# Altium PCB WoodStoveLayout1.PcbDoc (part 1 of 4)
Units mil, origin at the board's own origin, x right, y up, seen from the top; angles counter-clockwise.
Board outline 4000 x 3000 mil, 4 copper layers (Top Layer, L2, L3, Bottom Layer), stack 64.6 mil thick; 132 components, 92 nets, 551 pads, 53 vias.
Unrouted connection lines stored in the file: 224.
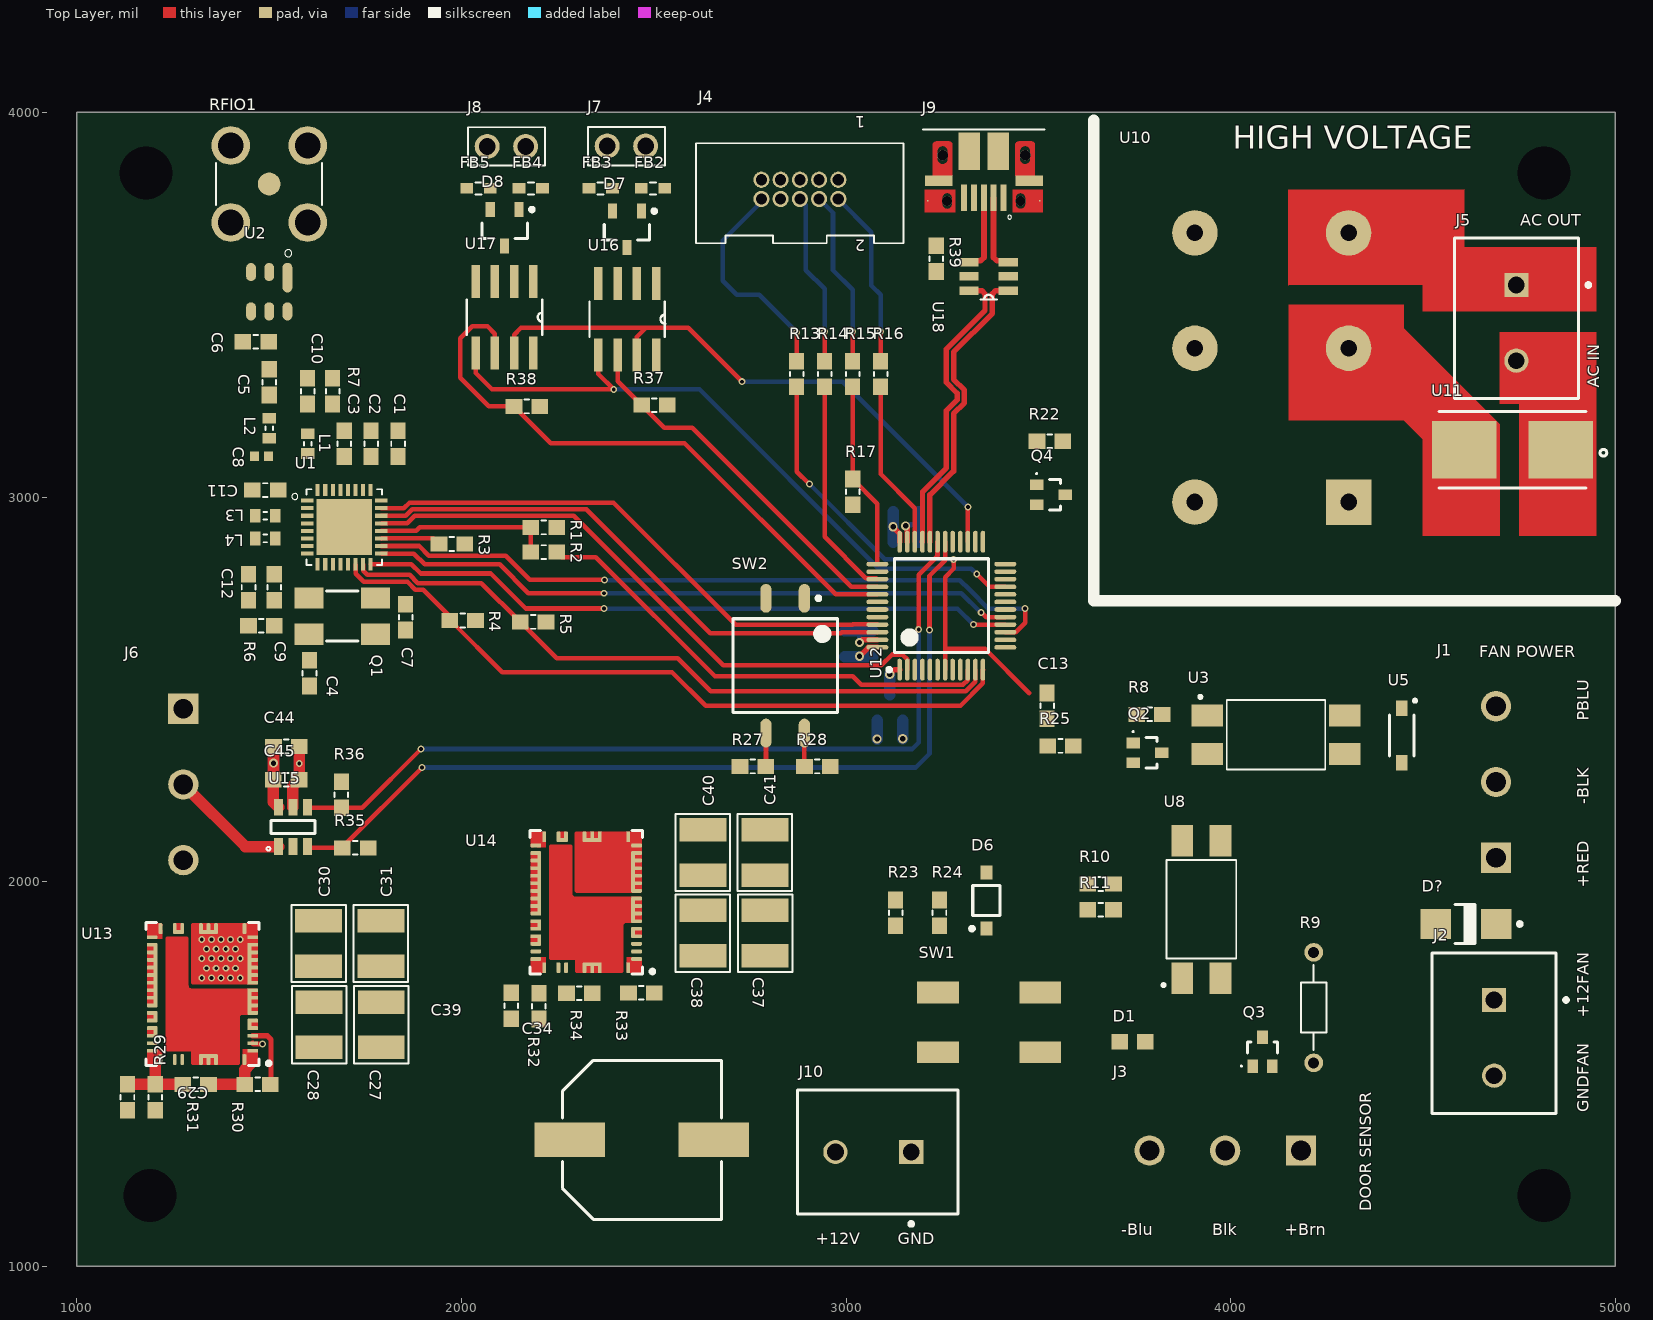
[diagram p0: Top Layer view]
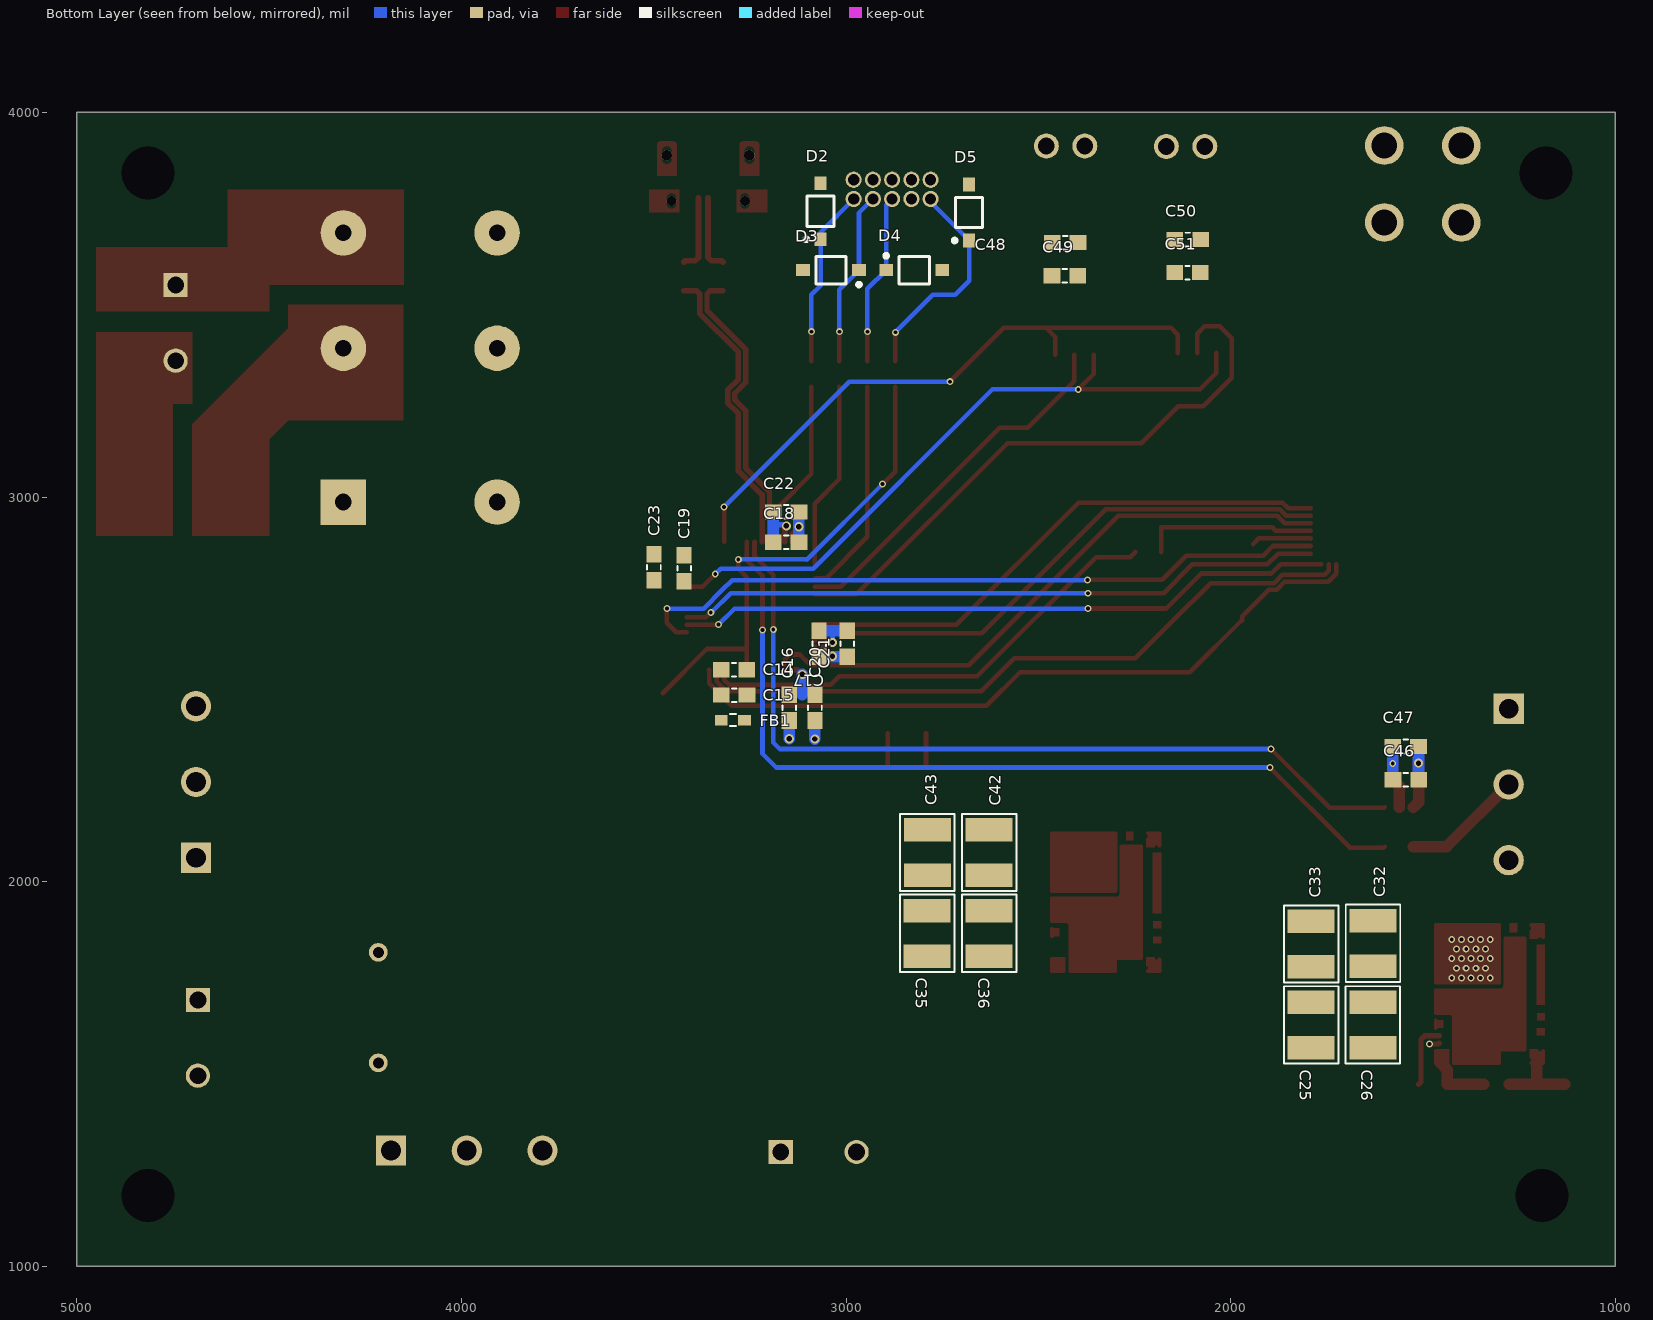
[diagram p1: Bottom Layer view, seen from below]
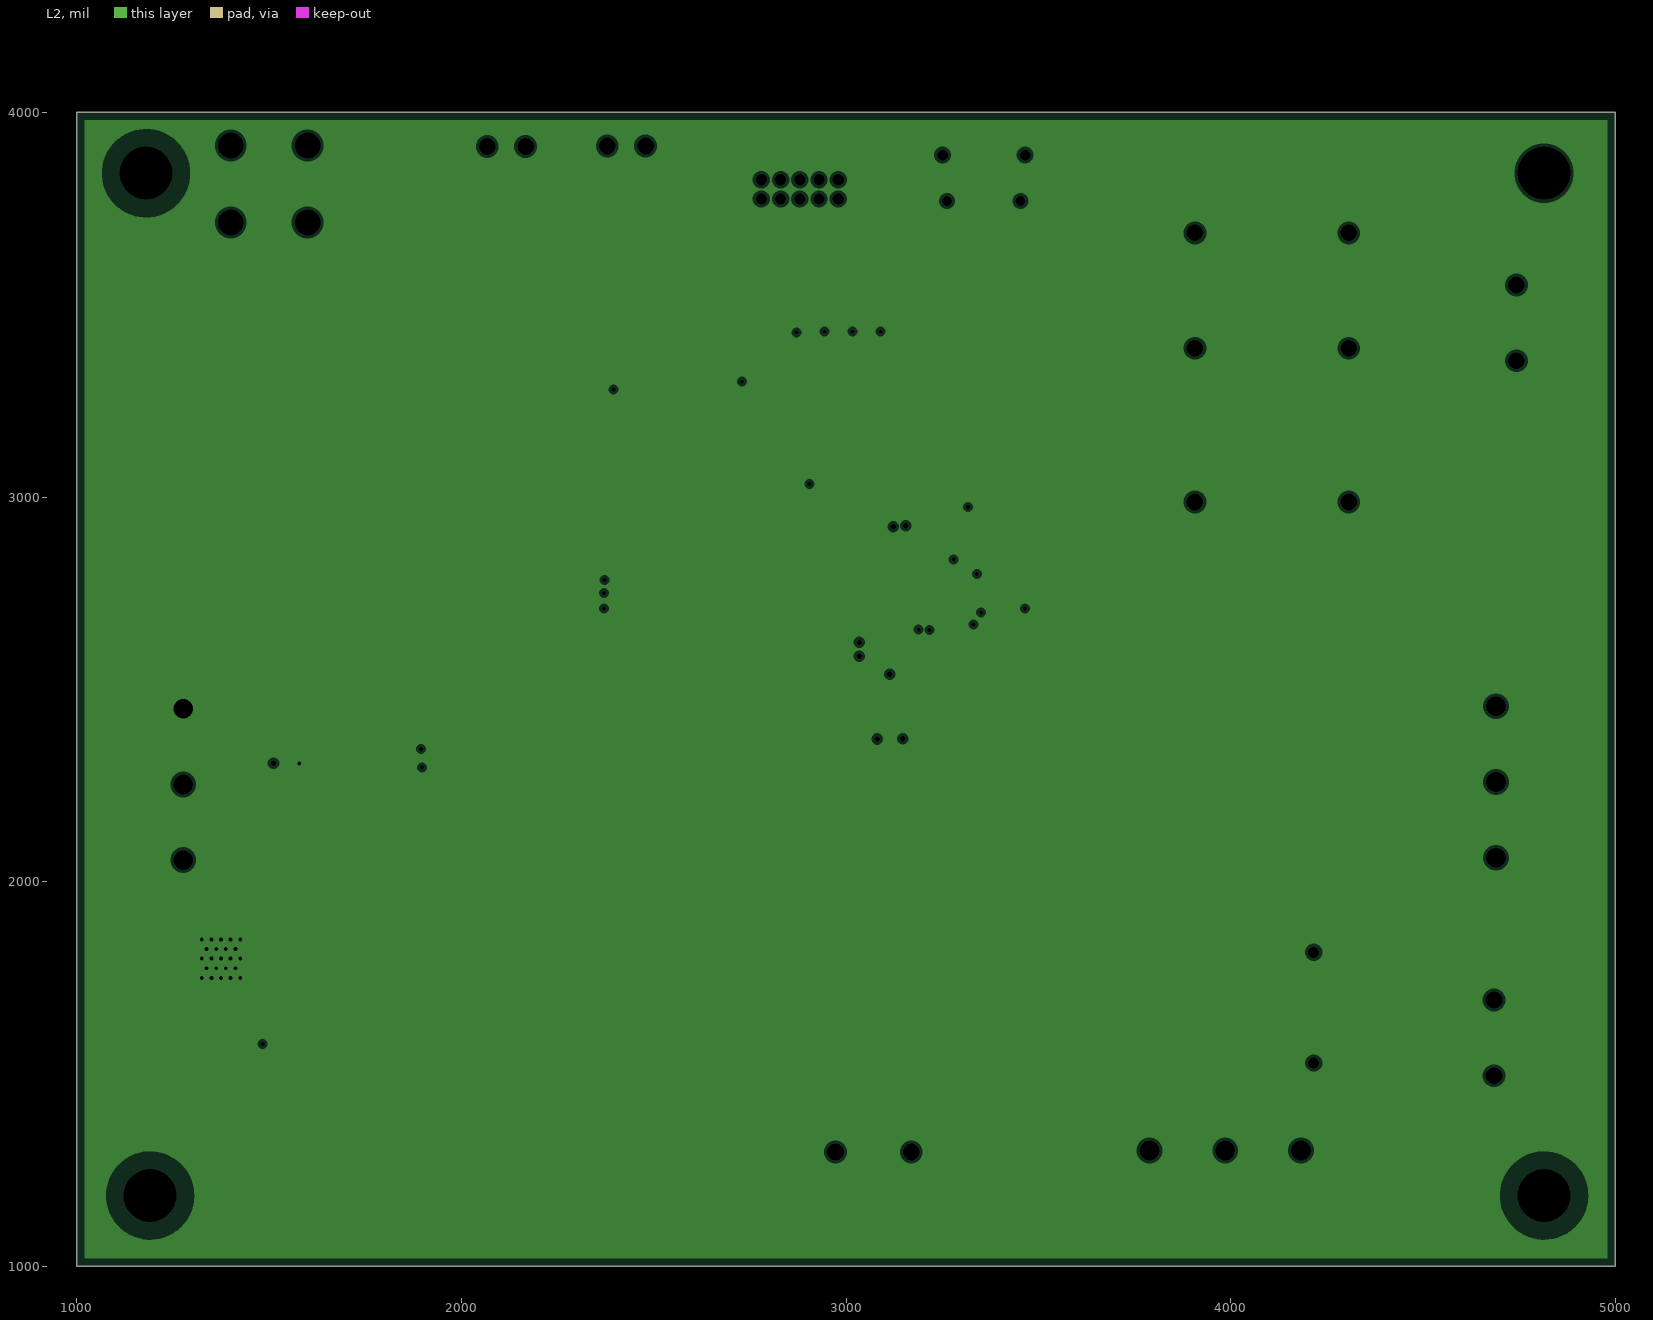
[diagram p2: L2, clearances drawn from the general rule]
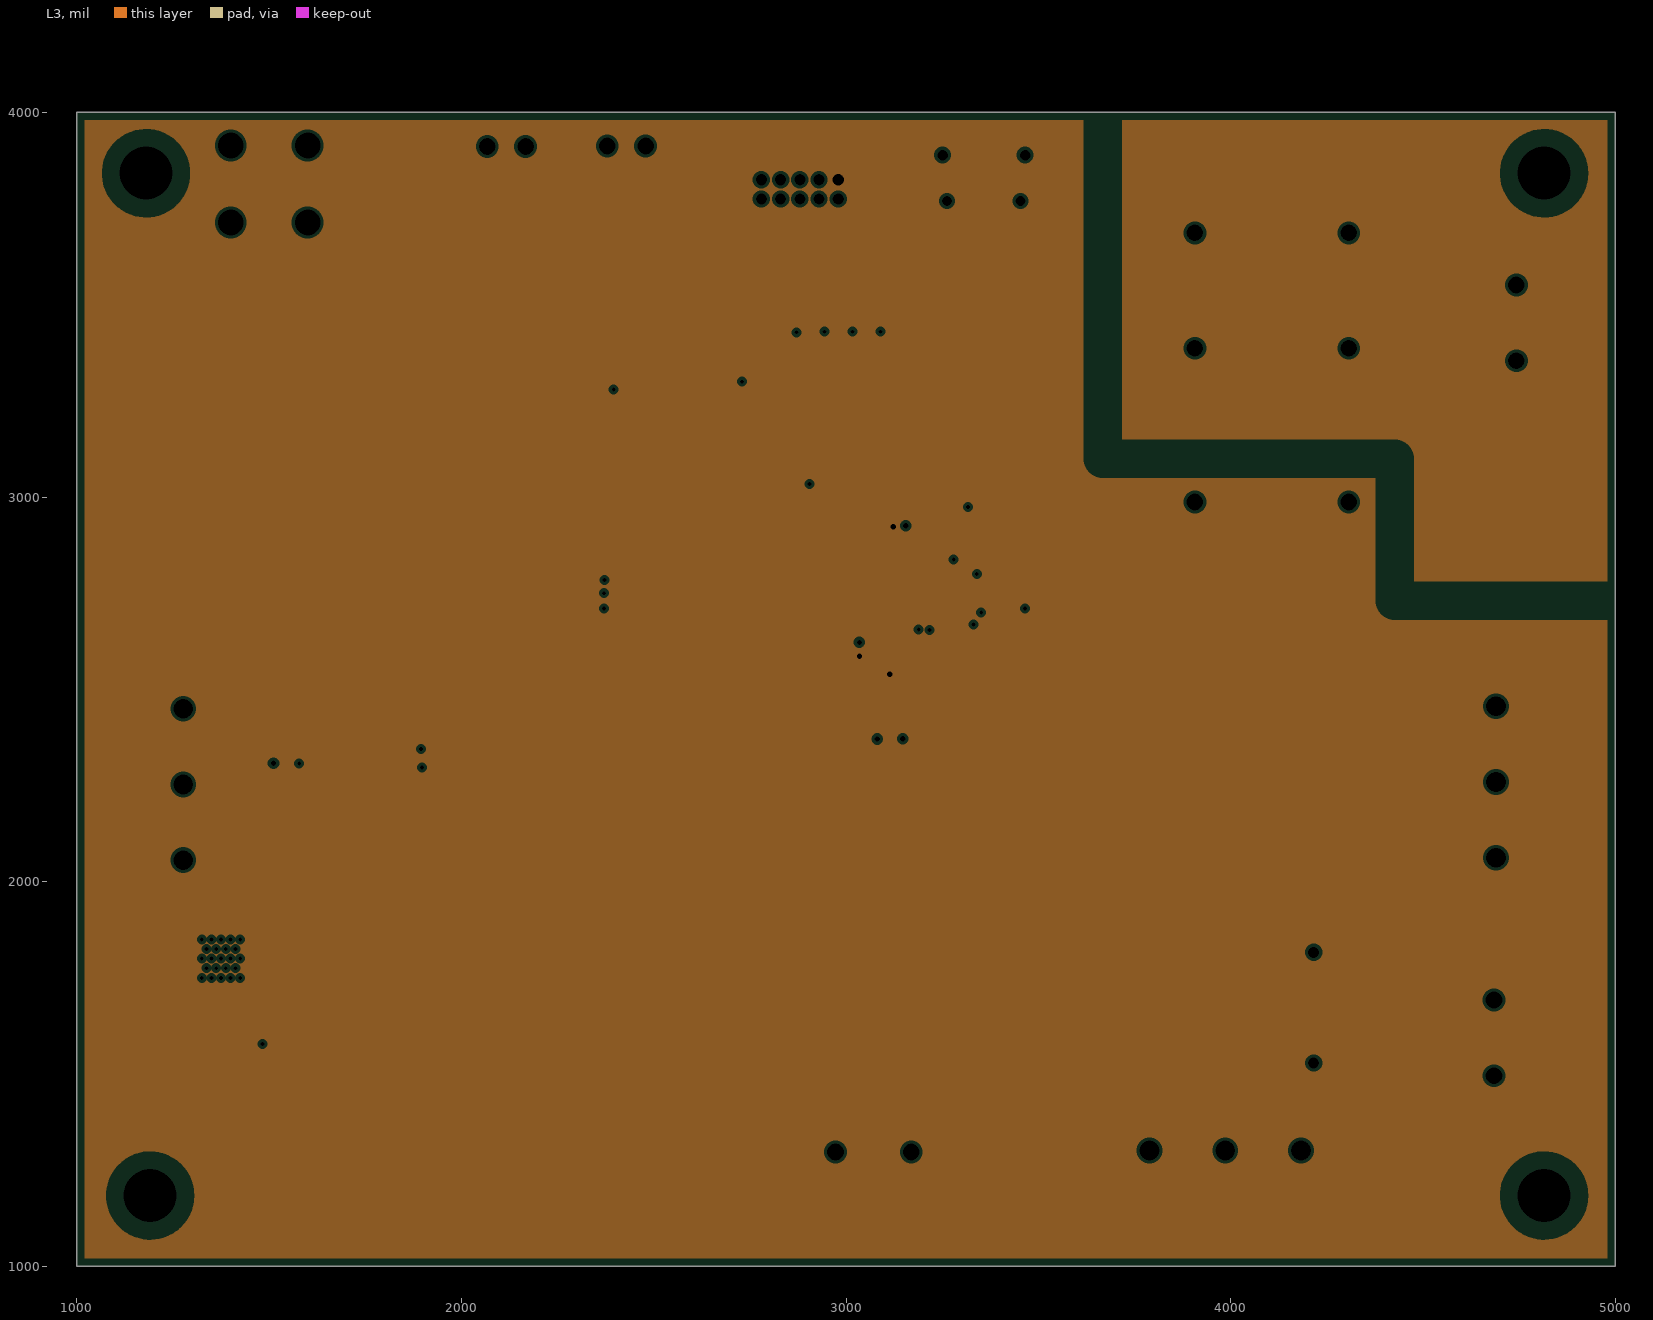
[diagram p3: L3, clearances drawn from the general rule]

## Layer stack, top to bottom
Top Solder: solder mask 1, Solder Resist, Dk 3.5
Top Layer: signal copper 1.4
Dielectric 1: core 6.7, FR-4, Dk 3.66
L2: plane copper 0.7, net +5V
Dielectric 3: prepreg 47, FR-4, Dk 3.66
L3: plane copper 0.7, net +3V3
Dielectric 2: core 6.7, FR-4, Dk 3.66
Bottom Layer: signal copper 1.4
Bottom Solder: solder mask 1, Solder Resist, Dk 3.5

## Board outline
1000,1000 1000,4000 5000,4000 5000,1000

## Design rules (kind name [scope] priority, off if disabled: settings)
Clearance [All] p1: gap=5 ignorepadtopadclearanceinfootprint=FALSE
ComponentClearance [All] p1: gap=2 collisioncheckmode=3 verticalgap=10 showdistances=FALSE
DiffPairsRouting DiffPair_DIFF90DiffPairsRouting [InDifferentialPair ('USB')] p1: maxlimit=8 minlimit=4 mostfreqgap=5 toplayer_minwidth=12 toplayer_maxwidth=14 toplayer_prefwidth=14 bottomlayer_minwidth=12 bottomlayer_maxwidth=14 bottomlayer_prefwidth=14 maxuncoupledlength=10
DiffPairsRouting [All] p2: maxlimit=10 minlimit=10 mostfreqgap=10 toplayer_minwidth=15 toplayer_maxwidth=15 toplayer_prefwidth=15 bottomlayer_minwidth=15 bottomlayer_maxwidth=15 bottomlayer_prefwidth=15 maxuncoupledlength=500
MatchedLengths "Jtag Matched Net Length" [InNetClass('JTAGDATA')] p1: tolerance=10 checknetsindiffpair=FALSE checkdiffpairvsdiffpair=TRUE checkxsignals=TRUE checkothers=TRUE
MatchedLengths "SPI1 Matched Net Length" [InNetClass('SPI1DATA')] p2: tolerance=10 checknetsindiffpair=FALSE checkdiffpairvsdiffpair=TRUE checkxsignals=TRUE checkothers=TRUE
MatchedLengths "I2C Matched Net Length" [InNetClass('I2CCLASS')] p3: tolerance=10 checknetsindiffpair=FALSE checkdiffpairvsdiffpair=TRUE checkxsignals=TRUE checkothers=TRUE
MatchedLengths "SPI2 Matched Net Length" [InNetClass('SPI2DATACLASS')] p4: tolerance=10 checknetsindiffpair=FALSE checkdiffpairvsdiffpair=TRUE checkxsignals=TRUE checkothers=TRUE
MatchedLengths DiffPair_DIFF90MatchedLengths [InDifferentialPair ('USB')] p5: tolerance=1 checknetsindiffpair=TRUE checkdiffpairvsdiffpair=FALSE checkxsignals=FALSE checkothers=FALSE
PlaneClearance [All] p1: clearance=8
PlaneConnect [All] p1: planeconnectstyle=Relief reliefexpansion=20 reliefentries=4 reliefconductorwidth=10 reliefairgap=10
PolygonConnect [All] p1: connectstyle=Relief reliefconductorwidth=10 reliefentries=4 polygonreliefangle="90 Angle" airgapwidth=10
RoutingVias POWER2 [InNet('+3V3')] p1: holewidth=14 width=24 viastyle="Through Hole" minholewidth=12 minwidth=20 maxholewidth=18 maxwidth=28
RoutingVias GroundVIas [InNet('GND')] p2: holewidth=14 width=24 viastyle="Through Hole" minholewidth=12 minwidth=20 maxholewidth=18 maxwidth=28
RoutingVias [All] p3: holewidth=10 width=18 viastyle="Through Hole" minholewidth=10 minwidth=18 maxholewidth=20 maxwidth=30
SolderMaskExpansion [All] p1: expansion=4
Width GroundWidth [InNet('GND')] p1: maxlimit=50 minlimit=12 preferedwidth=14
Width POWER [InNet('+3V3')] p2: maxlimit=50 minlimit=12 preferedwidth=14
Width [All] p3: maxlimit=30 minlimit=10 preferedwidth=12
26 further rules are at their usual default settings.

## Classes and differential pairs
net class JTAGDATA: NetR14_1 NetR15_1 NetR16_1
net class TCOUPLENETS: NetR37_1 NetR38_1 NetU12_21 NetU12_27
net class RFNETS: NetR2_2 NetR4_1 NetR5_1 NetU1_16 NetU1_17 NetU1_18 NetU1_21 NetU1_22 NetU1_23
net class SPI1DATA: NetU1_16 NetU1_17 NetU1_18
net class JTAGNETS: NetR14_1 NetR15_1 NetR16_1 RSTNET
net class SPI2DATACLASS: NetU12_21 NetU12_27
net class I2CCLASS: NetR35_1 NetR36_1
differential pair class DIFF90: USB USBOUT
net class USBOCLASS: USBOUT_N USBOUT_P
net class USBCLASS: USB_N USB_P
component class USB: J9 R39 U18
component class Thermocouple: C48 C49 C50 C51 D7 D8 FB2 FB3 FB4 FB5 J7 J8 R37 R38 U16 U17
component class RFDesign: C1 C2 C3 C4 C5 C6 C7 C8 C9 C10 C11 C12 L1 L2 L3 L4 Q1 R1 R2 R3 R4 R5 R6 R7 RFIO1 U1 U2
component class PressureSensor: C44 C45 C46 C47 J6 R35 R36 U15
component class Power: C25 C26 C27 C28 C29 C30 C31 C32 C33 C34 C35 C36 C37 C38 C39 C40 C41 C42 C43 J10 R29 R30 R31 R32 R33 R34 U13 U14
component class MCU: C13 C14 C15 C16 C17 C18 C19 C20 C21 C22 C23 D6 FB1 R23 R24 R25 R27 R28 SW1 SW2 U12
component class LightRelay: J5 Q4 R22 U10 U11
component class JTAG: D2 D3 D4 D5 J4 R13 R14 R15 R16 R17
component class InductiveSensor: D1 J3 Q3 R9 R10 R11 U8
component class FanPWM: D? J1 J2 Q2 R8 U3 U5
differential pair USB: +USB_P -USB_N
differential pair USBOUT: +USBOUT_P -USBOUT_N

## Components (designator, comment, footprint, x,y, rotation, side; value= is the part's Value field where it differs from the comment)
C1 "1uf_10V_0603" 0603#1 1835.33,3139 r270 top
C2 "1uf_10V_0603" 0603#1 1765.33,3139 r270 top
C3 "220nF_25V_0603" 0603#1 1695.33,3139 r270 top
C4 "NC_0603" 0603#1 1605.09,2542.07 r270 top
C5 "22pF_50V_0603" 0603#1 1500.33,3299 r270 top
C6 "1.8pF_50V_0603" 0603#1 1465.33,3404 r0 top
C7 "NC_0603" 0603#1 1855,2687.85 r90 top
C8 "Cap" 0402#1 1480.33,3106 r0 top value=4.7uf
C9 "680pF_50V_0603" 0603#1 1513.56,2765.53 r270 top
C10 "47nF_50V_0603" 0603#1 1600.33,3275.53 r270 top
C11 "100nF_50V_0603" 0603#1 1490.09,3018.21 r0 top
C12 "10nF_50V_0603" 0603#1 1446.63,2765.53 r90 top
C13 "100nF_50V_0603" 0603#1 3523,2457 r270 top
C14 "1uf_10V_0603" 0603#1 3291.17,2551.23 r0 bottom
C15 "100nF_50V_0603" 0603#1 3291,2485 r0 bottom
C16 "100nF_50V_0603" 0603#1 3147.59,2452.57 r90 bottom
C17 "100nF_50V_0603" 0603#1 3069.85,2618.57 r270 bottom
C18 "100nF_50V_0603" 0603#1 3155.86,2882.57 r180 bottom
C19 "100nF_50V_0603" 0603#1 3420.86,2814.84 r90 bottom
C20 "1uf_10V_0603" 0603#1 3080.86,2452.57 r90 bottom
C21 "1uf_10V_0603" 0603#1 2996.86,2618.57 r270 bottom
C22 "1uf_10V_0603" 0603#1 3155.86,2961.49 r180 bottom
C23 "1uf_10V_0603" 0603#1 3499.32,2817.57 r90 bottom
C25 "10uF_50V_1210" 1210 1790.87,1627.79 r270 bottom
C26 "10uF_50V_1210" 1210 1630,1627.79 r270 bottom
C27 "4.7uf_50V_1210" 1210 1791.67,1628.1 r270 top
C28 "4.7uf_50V_1210" 1210 1630,1628.1 r270 top
C29 "100pF_50V_0603" 0603#1 1131.8,1439.44 r270 top
C30 "22uF_25V_1210" 1210 1629,1839.06 r90 top
C31 "22uF_25V_1210" 1210 1790.67,1839.06 r90 top
C32 "22uF_25V_1210" 1210 1629.87,1839.79 r90 bottom
C33 "22uF_25V_1210" 1210 1790.67,1837.79 r90 bottom
C34 "100uF_50V_smd_NC" CAPAE120103X105M 2469,1329 r0 top
C35 "10uF_50V_1210" 1210 2788.87,1865.79 r270 bottom
C36 "10uF_50V_1210" 1210 2628,1865.79 r270 bottom
C37 "4.7uf_50V_1210" 1210 2789.67,1866.1 r270 top
C38 "4.7uf_50V_1210" 1210 2628,1866.1 r270 top
C39 "150pF_50V_0603" 0603#1 2129.8,1677.44 r90 top
C40 "22uF_25V_1210" 1210 2628,2075.94 r90 top
C41 "22uF_25V_1210" 1210 2789,2075.94 r90 top
C42 "22uF_25V_1210" 1210 2628,2075.94 r90 bottom
C43 "47uF_16V_1210" 1210 2788.67,2075.79 r90 bottom
C44 "10nF_50V_0603" 0603#1 1544.93,2351.48 r0 top
C45 "100nF_50V_0603" 0603#1 1544.54,2265 r0 top
C46 "NC_0603" 0603#1 1544.54,2265 r0 bottom
C47 "NC_0603" 0603#1 1544.93,2351.48 r0 bottom
C48 "NC_0603" 0603#1 2430.09,3661.61 r180 bottom
C49 "100nF_50V_0603" 0603#1 2431.09,3575.61 r180 bottom
C50 "NC_0603" 0603#1 2111.43,3669.61 r180 bottom
C51 "100nF_50V_0603" 0603#1 2112.09,3583.61 r180 bottom
D1 "LTST-C191KRKT" 0603#1 3745,1584 r180 top
D2 "MMSZ5V1T1G" SOIC127P370X94-2N 3066.04,3742.83 r90 bottom
D3 "MMSZ5V1T1G" SOIC127P370X94-2N 3039.09,3590 r0 bottom
D4 "MMSZ5V1T1G" SOIC127P370X94-2N 2822.83,3590 r180 bottom
D5 "MMSZ5V1T1G" SOIC127P370X94-2N 2680,3740 r90 bottom
D6 "MMSZ5V1T1G" SOIC127P370X94-2N 3365,1951 r90 top
D7 "SZNUP2105LT1G" SOT-23-3 2430.49,3696.36 r270 top
D8 "SZNUP2105LT1G" SOT-23-3 2112.49,3700.36 r270 top
D? "SS16T3G" ONSC-SMA-2-403D-02_V 4612,1890 r180 top
FB1 "600OHM_100MHz" 0603#2 3294,2420 r0 bottom
FB2 "470OHM_100MHZ" 0603#2 2498.09,3802.61 r180 top
FB3 "470OHM_100MHZ" 0603#2 2362.09,3802.61 r0 top
FB4 "470OHM_100MHZ" 0603#2 2180.6,3802.61 r180 top
FB5 "470OHM_100MHZ" 0603#2 2044.58,3802.61 r0 top
J1 "3PinTerminalBlock" "3 POS 5mm Pitch" 4690.09,2062.44 r90 top
J2 "282836-2" TECO-282836-2_V 4685,1594 r270 top
J3 "3PinTerminalBlock" "3 POS 5mm Pitch" 4182.85,1301 r180 top
J4 "10Pin1.27mm_JTAG" 10Pin1.27mm 2880,3800.04 r180 top
J5 "282836-2" TECO-282836-2_V 4743,3453 r270 top
J6 "3PinTerminalBlock" "3 POS 5mm Pitch" 1277,2449.7 r270 top
J7 "2PinTerminalBlock" "2 Pos 2.54mm Pitch" 2429.09,3912.61 r0 top
J8 "2PinTerminalBlock" "2 Pos 2.54mm Pitch" 2117.09,3911.61 r0 top
J9 "USB MICRO B" 10103594-0001LF 3358.44,3889.14 r180 top
J10 "282836-2" TECO-282836-2_V 3071,1297.14 r180 top
L1 "100nH_0402" 0402#2 1600.33,3139 r90 top
L2 "8.2nH_0402_Q8" 0402#2 1500.33,3179 r270 top
L3 "8.2nH_0402" 0402#2 1490.09,2951.48 r0 top
L4 "8.2nH_0402" 0402#2 1490.09,2892.42 r0 top
Q1 "Crystal_12_8" "4-SMD No Lead" 1690.09,2690.53 r0 top
Q2 "NVS4001NT1G" ONSC-SC-70-3-419-04_V 3784,2335 r0 top
Q3 "NVS4001NT1G" ONSC-SC-70-3-419-04_V 4083,1558 r90 top
Q4 "NVS4001NT1G" ONSC-SC-70-3-419-04_V 3533,3006 r0 top
R1 "100k_0603" 0603#1 2214.09,2921.06 r0 top
R2 "NC_0603" 0603#1 2214.09,2857.06 r0 top
R3 "NC_0603" 0603#1 1975.09,2878.06 r180 top
R4 "10k_0603" 0603#1 2003.09,2679.06 r0 top
R5 "10k_0603" 0603#1 2186.6,2675.39 r0 top
R6 "6.8k_0603" 0603#1 1480.09,2665.53 r0 top
R7 "1_0603" 0603#1 1665.33,3275.53 r90 top
R8 "110_0603" 0603#1 3789.15,2435 r180 top
R9 "560_7.3mmTH" "7.3mm Through Hole" 4216,1672.64 r270 top
R10 "NC_0603" 0603#1 3662,1994 r180 top
R11 "68_0603" 0603#1 3662,1927 r0 top
R13 "22_0603" 0603#1 2871.63,3320 r90 top
R14 "22_0603" 0603#1 2944.42,3320 r90 top
R15 "22_0603" 0603#1 3017.21,3320 r90 top
R16 "22_0603" 0603#1 3090,3320 r90 top
R17 "10k_0603" 0603#1 3017.42,3013.47 r270 top
R22 "10_0603" 0603#1 3530,3145 r180 top
R23 "NC_0603" 0603#1 3129,1919 r90 top
R24 "22_0603" 0603#1 3243,1919 r270 top
R25 "22_0603" 0603#1 3557.69,2353 r0 top
R27 "10k_0603" 0603#1 2757.86,2299.57 r180 top
R28 "10k_0603" 0603#1 2925.4,2299.57 r180 top
R29 "40.2K_0603" 0603#1 1204.16,1439.44 r270 top
R30 "88.7K_0603" 0603#1 1470,1473 r0 top
R31 "10k_0603" 0603#1 1308.88,1472.91 r180 top
R32 "23.2k_0603" 0603#1 2201.43,1676.63 r90 top
R33 "133k_0603" 0603#1 2468,1711 r0 top
R34 "10k_0603" 0603#1 2306.74,1710.09 r180 top
R35 "10k_0603" 0603#1 1724,2088 r0 top
R36 "10k_0603" 0603#1 1688,2226 r90 top
R37 "10k_0603" 0603#1 2502,3239 r0 top
R38 "10k_0603" 0603#1 2170.09,3235.67 r0 top
R39 "15k_0603" 0603#1 3234.76,3620 r90 top
RFIO1 "SMA Straight PCB" "SMA Straight PCB" 1500.33,3814 r270 top
SW1 "B3SN-3012P" B3SN-3012P 3374,1628 r180 top
SW2 "SPST DIP 2Pos" SOP254P990X385-4N 2841.86,2561.57 r270 top
U1 "SX1211" SX1211 1695.33,2921.95 r0 top
U2 "B39871B3715U410" B39871B3715U410 1500.33,3534 r270 top
U3 "FOD817D3SD" FOD817D3SD 4118,2382 r0 top
U5 "1N5819HW-7-F" 1N5819HW-7-F 4445,2380 r270 top
U8 "FOD817D3SD" FOD817D3SD 3924,1928 r90 top
U10 "G6C-2114P-US" G6C-2114P-US 4307,2987 r180 top
U11 "2A_125VAC" 2410 4733,3123 r180 top
U12 "STM32L4" TSQFP50P900X900X160-48N 3247.86,2717.57 r90 top
U13 "LMZM33602" QFN50P700X900X410_HS-55N#1 1326.8,1707.91 r180 top
U14 "LMZM33602" QFN50P700X900X410_HS-55N#2 2324.46,1946.63 r180 top
U15 "ADS1100A0IDBVR" ADS1100A0IDBVR 1562,2142.48 r90 top
U16 "MAX31855KASA+T" MAX31855KASA+T 2431.09,3462.61 r270 top
U17 "MAX31855KASA+T" MAX31855KASA+T 2112.09,3467.61 r270 top
U18 "TPD2S017DBVR" SOT95P280X145-6N 3371.03,3573.92 r180 top

## Footprints (in the part's own frame and the unit in brackets; to place one, negate y for a bottom-side part, rotate by r counter-clockwise, add the part's x,y. Pads: shape width x height; smd on the part's side, far side on the other; paste and mask are expansions set on the pad)
1N5819HW-7-F [mm]
  rect 1x0.75 smd: A(1.8,0) C(-1.8,0)
  silkscreen extent -2.4,-0.8 1.35,0.97
"2 Pos 2.54mm Pitch" [mm]
  round 1.65 hole 1.1: 1(-1.27,0) 2(1.27,0)
  silkscreen extent -2.54,-1.27 2.54,1.27
"3 POS 5mm Pitch" [mm]
  rect 2x2 hole 1.3: 1(0,0)
  round 2 hole 1.3: 2(5,0) 3(10,0)
"4-SMD No Lead" [mm]
  rect 1.9x1.4 smd: 1(-2.2,-1.2) 2(2.2,-1.2) 3(2.2,1.2) 4(-2.2,1.2)
  silkscreen extent -1.05,-1.65 1.05,1.65
"7.3mm Through Hole" [mm]
  round 1.238 hole 0.73: 1(-3.65,0) 2(3.65,0)
  silkscreen extent -2.8,-0.85 2.8,0.85
10Pin1.27mm [mil]
  round 42 hole 29: 1(-100,-25) 2(-100,25) 3(-50,-25) 4(-50,25) 5(0,-25) 6(0,25) 7(50,-25) 8(50,25) 9(100,-25) 10(100,25)
  silkscreen extent -270,-120 270,140, body extent -250,-105 250,115, height 210
0402#1 [mm]
  rect 0.58x0.62 smd: 1(-0.47,0) 2(0.47,0)
0402#2 [mm]
  rect 0.7x0.9 smd: 1(-0.65,0) 2(0.65,0)
  silkscreen extent -0.13,-0.25 0.13,0.25
0603#1 [mm]
  rect 1.1x1 smd: 1(-0.85,0) 2(0.85,0)
  silkscreen extent -0.15,-0.45 0.15,0.45
0603#2 [mm]
  rect 0.85x0.7 smd: 1(-0.775,0) 2(0.775,0)
  silkscreen extent -0.2,-0.4 0.2,0.4
1210 [mm]
  rect 1.55x3.1 smd: 1(-1.5,0) 2(1.5,0)
  silkscreen extent -2.55,-1.8 2.55,1.8
2410 [mm]
  rect 4.24x3.81 smd: 1(-3.19,0) 2(3.19,0)
  silkscreen extent -6.22,-2.51 4.86,2.51, body extent -3.17,-1.32 3.17,1.32, height 2.64
10103594-0001LF [mm]
  rect 0.4x1.75 smd: 1(-1.3,2.825) 2(-0.65,2.825) 3(0,2.825) 4(0.65,2.825) 5(1.3,2.825)
  round 0.7 hole 0.7 unplated: None(-2.725,0) None(2.725,0)
  round 0.65 hole 0.65 unplated: None(-2.425,3.03) None(2.425,3.03)
  rect 0.1x0.1 smd: P1(-3.7,3) P2(3.7,3)
  rect 1.825x0.7 smd: P3(-2.987,1.7) P4(2.987,1.7)
  rect 1.425x2.5 smd: P5(-0.963,-0.25) P6(0.963,-0.25)
  Top Layer region: -2.725,0.605 -2.725,1.35 -2.075,1.35 -2.075,-0.66 -2.075,-0.666 -2.076,-0.679 -2.077,-0.691 -2.079,-0.704 -2.082,-0.716 -2.085,-0.728 -2.089,-0.74 -2.093,-0.752 -2.098,-0.763 -2.104,-0.775 -2.11,-0.785 -2.117,-0.796 -2.125,-0.806 -2.132,-0.816 -2.141,-0.825 -2.15,-0.834 -2.159,-0.843 -2.169,-0.85 -2.179,-0.858 -2.19,-0.865 -2.2,-0.871 -2.212,-0.877 -2.223,-0.882 -2.235,-0.886 -2.247,-0.89 -2.259,-0.893 -2.271,-0.896 -2.284,-0.898 -2.296,-0.899 -2.309,-0.9 -2.315,-0.9 -2.725,-0.9 -2.725,-0.605 -2.716,-0.605 -2.697,-0.604 -2.679,-0.602 -2.66,-0.599 -2.642,-0.595 -2.624,-0.59 -2.606,-0.585 -2.589,-0.578 -2.572,-0.571 -2.556,-0.562 -2.539,-0.553 -2.524,-0.543 -2.509,-0.532 -2.494,-0.52 -2.481,-0.508 -2.467,-0.494 -2.455,-0.481 -2.443,-0.466 -2.432,-0.451 -2.422,-0.436 -2.413,-0.419 -2.404,-0.403 -2.397,-0.386 -2.39,-0.369 -2.385,-0.351 -2.38,-0.333 -2.376,-0.315 -2.373,-0.296 -2.371,-0.278 -2.37,-0.259 -2.37,-0.25 -2.37,0 -2.37,0.25 -2.37,0.259 -2.371,0.278 -2.373,0.296 -2.376,0.315 -2.38,0.333 -2.385,0.351 -2.39,0.369 -2.397,0.386 -2.404,0.403 -2.413,0.419 -2.422,0.436 -2.432,0.451 -2.443,0.466 -2.455,0.481 -2.467,0.494 -2.481,0.508 -2.494,0.52 -2.509,0.532 -2.524,0.543 -2.539,0.553 -2.556,0.562 -2.572,0.571 -2.589,0.578 -2.606,0.585 -2.624,0.59 -2.642,0.595 -2.66,0.599 -2.679,0.602 -2.697,0.604 -2.716,0.605 -2.725,0.605
  Top Layer region: -2.725,-0.605 -2.725,-0.9 -3.135,-0.9 -3.145,-0.9 -3.151,-0.9 -3.163,-0.899 -3.175,-0.898 -3.187,-0.896 -3.199,-0.894 -3.21,-0.891 -3.222,-0.887 -3.233,-0.883 -3.244,-0.878 -3.255,-0.872 -3.265,-0.866 -3.275,-0.86 -3.285,-0.853 -3.294,-0.845 -3.303,-0.837 -3.312,-0.828 -3.32,-0.819 -3.328,-0.81 -3.335,-0.8 -3.341,-0.79 -3.347,-0.78 -3.353,-0.769 -3.358,-0.758 -3.362,-0.747 -3.366,-0.735 -3.369,-0.724 -3.371,-0.712 -3.373,-0.7 -3.374,-0.688 -3.375,-0.676 -3.375,-0.67 -3.375,1.12 -3.375,1.126 -3.374,1.138 -3.373,1.15 -3.371,1.162 -3.369,1.174 -3.366,1.185 -3.362,1.197 -3.358,1.208 -3.353,1.219 -3.347,1.23 -3.341,1.24 -3.335,1.25 -3.328,1.26 -3.32,1.269 -3.312,1.278 -3.303,1.287 -3.294,1.295 -3.285,1.303 -3.275,1.31 -3.265,1.316 -3.255,1.322 -3.244,1.328 -3.233,1.333 -3.222,1.337 -3.21,1.341 -3.199,1.344 -3.187,1.346 -3.175,1.348 -3.163,1.349 -3.151,1.35 -3.145,1.35 -3.14,1.35 -2.725,1.35 -2.725,0.605 -2.734,0.605 -2.753,0.604 -2.771,0.602 -2.79,0.599 -2.808,0.595 -2.826,0.59 -2.844,0.585 -2.861,0.578 -2.878,0.571 -2.894,0.562 -2.911,0.553 -2.926,0.543 -2.941,0.532 -2.956,0.52 -2.969,0.508 -2.983,0.494 -2.995,0.481 -3.007,0.466 -3.018,0.451 -3.028,0.436 -3.037,0.419 -3.046,0.403 -3.053,0.386 -3.06,0.369 -3.066,0.351 -3.07,0.333 -3.074,0.315 -3.077,0.296 -3.079,0.278 -3.08,0.259 -3.08,0.25 -3.08,0 -3.08,-0.25 -3.08,-0.259 -3.079,-0.278 -3.077,-0.296 -3.074,-0.315 -3.07,-0.333 -3.066,-0.351 -3.06,-0.369 -3.053,-0.386 -3.046,-0.403 -3.037,-0.419 -3.028,-0.436 -3.018,-0.451 -3.007,-0.466 -2.995,-0.481 -2.983,-0.494 -2.969,-0.508 -2.956,-0.52 -2.941,-0.532 -2.926,-0.543 -2.911,-0.553 -2.894,-0.562 -2.878,-0.571 -2.861,-0.578 -2.844,-0.585 -2.826,-0.59 -2.808,-0.595 -2.79,-0.599 -2.771,-0.602 -2.753,-0.604 -2.734,-0.605 -2.725,-0.605
  Top Layer region: -3.375,1.12 -3.375,1.35 -3.135,1.35 -3.135,1.12
  Top Layer region: 2.725,0.605 2.725,1.35 3.375,1.35 3.375,-0.66 3.375,-0.666 3.374,-0.679 3.373,-0.691 3.371,-0.704 3.368,-0.716 3.365,-0.728 3.361,-0.74 3.357,-0.752 3.352,-0.763 3.346,-0.775 3.34,-0.785 3.333,-0.796 3.325,-0.806 3.318,-0.816 3.309,-0.825 3.3,-0.834 3.291,-0.843 3.281,-0.85 3.271,-0.858 3.26,-0.865 3.25,-0.871 3.238,-0.877 3.227,-0.882 3.215,-0.886 3.203,-0.89 3.191,-0.893 3.179,-0.896 3.166,-0.898 3.154,-0.899 3.141,-0.9 3.135,-0.9 2.725,-0.9 2.725,-0.605 2.734,-0.605 2.753,-0.604 2.771,-0.602 2.79,-0.599 2.808,-0.595 2.826,-0.59 2.844,-0.585 2.861,-0.578 2.878,-0.571 2.894,-0.562 2.911,-0.553 2.926,-0.543 2.941,-0.532 2.956,-0.52 2.969,-0.508 2.983,-0.494 2.995,-0.481 3.007,-0.466 3.018,-0.451 3.028,-0.436 3.037,-0.419 3.046,-0.403 3.053,-0.386 3.06,-0.369 3.066,-0.351 3.07,-0.333 3.074,-0.315 3.077,-0.296 3.079,-0.278 3.08,-0.259 3.08,-0.25 3.08,0 3.08,0.25 3.08,0.259 3.079,0.278 3.077,0.296 3.074,0.315 3.07,0.333 3.066,0.351 3.06,0.369 3.053,0.386 3.046,0.403 3.037,0.419 3.028,0.436 3.018,0.451 3.007,0.466 2.995,0.481 2.983,0.494 2.969,0.508 2.956,0.52 2.941,0.532 2.926,0.543 2.911,0.553 2.894,0.562 2.878,0.571 2.861,0.578 2.844,0.585 2.826,0.59 2.808,0.595 2.79,0.599 2.771,0.602 2.753,0.604 2.734,0.605 2.725,0.605
  Top Layer region: 2.725,-0.605 2.725,-0.9 2.315,-0.9 2.305,-0.9 2.299,-0.9 2.287,-0.899 2.275,-0.898 2.263,-0.896 2.251,-0.894 2.24,-0.891 2.228,-0.887 2.217,-0.883 2.206,-0.878 2.195,-0.872 2.185,-0.866 2.175,-0.86 2.165,-0.853 2.156,-0.845 2.147,-0.837 2.138,-0.828 2.13,-0.819 2.122,-0.81 2.115,-0.8 2.109,-0.79 2.103,-0.78 2.097,-0.769 2.092,-0.758 2.088,-0.747 2.084,-0.735 2.081,-0.724 2.079,-0.712 2.077,-0.7 2.076,-0.688 2.075,-0.676 2.075,-0.67 2.075,1.12 2.075,1.126 2.076,1.138 2.077,1.15 2.079,1.162 2.081,1.174 2.084,1.185 2.088,1.197 2.092,1.208 2.097,1.219 2.103,1.23 2.109,1.24 2.115,1.25 2.122,1.26 2.13,1.269 2.138,1.278 2.147,1.287 2.156,1.295 2.165,1.303 2.175,1.31 2.185,1.316 2.195,1.322 2.206,1.328 2.217,1.333 2.228,1.337 2.24,1.341 2.251,1.344 2.263,1.346 2.275,1.348 2.287,1.349 2.299,1.35 2.305,1.35 2.31,1.35 2.725,1.35 2.725,0.605 2.716,0.605 2.697,0.604 2.679,0.602 2.66,0.599 2.642,0.595 2.624,0.59 2.606,0.585 2.589,0.578 2.572,0.571 2.556,0.562 2.539,0.553 2.524,0.543 2.509,0.532 2.494,0.52 2.481,0.508 2.467,0.494 2.455,0.481 2.443,0.466 2.432,0.451 2.422,0.436 2.413,0.419 2.404,0.403 2.397,0.386 2.39,0.369 2.385,0.351 2.38,0.333 2.376,0.315 2.373,0.296 2.371,0.278 2.37,0.259 2.37,0.25 2.37,0 2.37,-0.25 2.37,-0.259 2.371,-0.278 2.373,-0.296 2.376,-0.315 2.38,-0.333 2.385,-0.351 2.39,-0.369 2.397,-0.386 2.404,-0.403 2.413,-0.419 2.422,-0.436 2.432,-0.451 2.443,-0.466 2.455,-0.481 2.467,-0.494 2.481,-0.508 2.494,-0.52 2.509,-0.532 2.524,-0.543 2.539,-0.553 2.556,-0.562 2.572,-0.571 2.589,-0.578 2.606,-0.585 2.624,-0.59 2.642,-0.595 2.66,-0.599 2.679,-0.602 2.697,-0.604 2.716,-0.605 2.725,-0.605
  Top Layer region: 2.075,1.12 2.075,1.35 2.315,1.35 2.315,1.12
  Top Layer region: -2.425,3.56 -2.425,3.76 -1.9,3.76 -1.9,2.3 -2.425,2.3 -2.425,2.5 -2.416,2.5 -2.399,2.501 -2.382,2.503 -2.365,2.505 -2.348,2.509 -2.331,2.513 -2.315,2.519 -2.299,2.525 -2.283,2.532 -2.267,2.54 -2.253,2.549 -2.238,2.558 -2.224,2.568 -2.211,2.579 -2.198,2.591 -2.186,2.603 -2.174,2.616 -2.163,2.629 -2.153,2.643 -2.144,2.658 -2.135,2.672 -2.127,2.688 -2.12,2.704 -2.114,2.72 -2.108,2.736 -2.104,2.753 -2.1,2.77 -2.098,2.787 -2.096,2.804 -2.095,2.821 -2.095,2.83 -2.095,3.03 -2.095,3.23 -2.095,3.239 -2.096,3.256 -2.098,3.273 -2.1,3.29 -2.104,3.307 -2.108,3.324 -2.114,3.34 -2.12,3.356 -2.127,3.372 -2.135,3.388 -2.144,3.402 -2.153,3.417 -2.163,3.431 -2.174,3.444 -2.186,3.457 -2.198,3.469 -2.211,3.481 -2.224,3.492 -2.238,3.502 -2.253,3.511 -2.267,3.52 -2.283,3.528 -2.299,3.535 -2.315,3.541 -2.331,3.547 -2.348,3.551 -2.365,3.555 -2.382,3.557 -2.399,3.559 -2.416,3.56 -2.425,3.56
  Top Layer region: -2.425,3.56 -2.425,3.76 -3.9,3.76 -3.9,2.3 -2.425,2.3 -2.425,2.5 -2.434,2.5 -2.451,2.501 -2.468,2.503 -2.485,2.505 -2.502,2.509 -2.519,2.513 -2.535,2.519 -2.551,2.525 -2.567,2.532 -2.583,2.54 -2.597,2.549 -2.612,2.558 -2.626,2.568 -2.639,2.579 -2.652,2.591 -2.664,2.603 -2.676,2.616 -2.687,2.629 -2.697,2.643 -2.706,2.658 -2.715,2.672 -2.723,2.688 -2.73,2.704 -2.736,2.72 -2.742,2.736 -2.746,2.753 -2.75,2.77 -2.752,2.787 -2.754,2.804 -2.755,2.821 -2.755,2.83 -2.755,3.03 -2.755,3.23 -2.755,3.239 -2.754,3.256 -2.752,3.273 -2.75,3.29 -2.746,3.307 -2.742,3.324 -2.736,3.34 -2.73,3.356 -2.723,3.372 -2.715,3.388 -2.706,3.402 -2.697,3.417 -2.687,3.431 -2.676,3.444 -2.664,3.457 -2.652,3.469 -2.639,3.481 -2.626,3.492 -2.612,3.502 -2.597,3.511 -2.583,3.52 -2.567,3.528 -2.551,3.535 -2.535,3.541 -2.519,3.547 -2.502,3.551 -2.485,3.555 -2.468,3.557 -2.451,3.559 -2.434,3.56 -2.425,3.56
  Top Layer region: 2.425,2.5 2.425,2.3 1.9,2.3 1.9,3.76 2.425,3.76 2.425,3.56 2.416,3.56 2.399,3.559 2.382,3.557 2.365,3.555 2.348,3.551 2.331,3.547 2.315,3.541 2.299,3.535 2.283,3.528 2.267,3.52 2.253,3.511 2.238,3.502 2.224,3.492 2.211,3.481 2.198,3.469 2.186,3.457 2.174,3.444 2.163,3.431 2.153,3.417 2.144,3.402 2.135,3.388 2.127,3.372 2.12,3.356 2.114,3.34 2.108,3.324 2.104,3.307 2.1,3.29 2.098,3.273 2.096,3.256 2.095,3.239 2.095,3.23 2.095,3.03 2.095,2.83 2.095,2.821 2.096,2.804 2.098,2.787 2.1,2.77 2.104,2.753 2.108,2.736 2.114,2.72 2.12,2.704 2.127,2.688 2.135,2.672 2.144,2.658 2.153,2.643 2.163,2.629 2.174,2.616 2.186,2.603 2.198,2.591 2.211,2.579 2.224,2.568 2.238,2.558 2.253,2.549 2.267,2.54 2.283,2.532 2.299,2.525 2.315,2.519 2.331,2.513 2.348,2.509 2.365,2.505 2.382,2.503 2.399,2.501 2.416,2.5 2.425,2.5
  Top Layer region: 2.425,2.5 2.425,2.3 3.9,2.3 3.9,3.76 2.425,3.76 2.425,3.56 2.434,3.56 2.451,3.559 2.468,3.557 2.485,3.555 2.502,3.551 2.519,3.547 2.535,3.541 2.551,3.535 2.567,3.528 2.583,3.52 2.597,3.511 2.612,3.502 2.626,3.492 2.639,3.481 2.652,3.469 2.664,3.457 2.676,3.444 2.687,3.431 2.697,3.417 2.706,3.402 2.715,3.388 2.723,3.372 2.73,3.356 2.736,3.34 2.742,3.324 2.746,3.307 2.75,3.29 2.752,3.273 2.754,3.256 2.755,3.239 2.755,3.23 2.755,3.03 2.755,2.83 2.755,2.821 2.754,2.804 2.752,2.787 2.75,2.77 2.746,2.753 2.742,2.736 2.736,2.72 2.73,2.704 2.723,2.688 2.715,2.672 2.706,2.658 2.697,2.643 2.687,2.629 2.676,2.616 2.664,2.603 2.652,2.591 2.639,2.579 2.626,2.568 2.612,2.558 2.597,2.549 2.583,2.54 2.567,2.532 2.551,2.525 2.535,2.519 2.519,2.513 2.502,2.509 2.485,2.505 2.468,2.503 2.451,2.501 2.434,2.5 2.425,2.5
  silkscreen extent -4.02,-1.7 4.02,4.23
ADS1100A0IDBVR [mm]
  rect 1.1x0.6 smd: 1(-1.3,0.95) 2(-1.3,0) 3(-1.3,-0.95) 4(1.3,-0.95) 5(1.3,0) 6(1.3,0.95)
  silkscreen extent -1.57,-1.45 0.43,1.74
B3SN-3012P [mm]
  rect 2.75x1.45 smd: 1(3.426,-2.135) 2(-3.324,-2.135) 3(3.426,1.815) 4(-3.324,1.815)
  body extent -3.52,-3.68 3.48,3.32, height 3.1
B39871B3715U410 [mm]
  oval 1.96x0.65 smd: 1(-0.93,1.2)
  oval 1.2x0.65 smd: 2(-1.3,0) 3(-1.3,-1.2) 4(1.3,-1.2) 5(1.3,0) 6(1.3,1.2)
  silkscreen extent -2.77,1.03 -2.31,1.49
CAPAE120103X105M [mm] "Aluminum Electrolytic Capacitor, Body 10.30x10.30x10.50mm, IPC Low Density"
  rect 4.65x2.3 smd: 1(-4.75,0) 2(4.75,0)
  silkscreen extent -5.25,-5.25 5.25,5.25, body extent -5.25,-5.25 5.25,5.25, height 10.5
FOD817D3SD [mm]
  rect 2.09x1.44 smd: 1(-4.54,1.27) 2(-4.54,-1.27) 3(4.54,-1.27) 4(4.54,1.27)
  silkscreen extent -5.1,-2.3 3.25,2.6
G6C-2114P-US [mm]
  rect 3x3 hole 1.1: 1(0,0)
  round 3 hole 1.1: 3(0,-10.16) 4(0,-17.78) 5(10.16,-17.78) 6(10.16,-10.16) 8(10.16,0)
MAX31855KASA+T [mil]
  rect 86x22 smd: 1(-93,75) 2(-93,25) 3(-93,-25) 4(-93,-75) 5(93,-75) 6(93,-25) 7(93,25) 8(93,75)
  silkscreen extent -46,-98 46,99
ONSC-SC-70-3-419-04_V [mm] "SOT23, 3-Leads, Body 2x1.25mm, Pitch 0.65mm"
  rect 0.9x0.7 smd: 1(-0.95,0.65) 2(-0.95,-0.65) 3(0.95,0)
  silkscreen extent -1,-1 0.63,1.45, body extent -0.63,-1 0.63,1, height 1
ONSC-SMA-2-403D-02_V [mm] "Molded, 2-Leads, Body 4.57x2.92mm"
  rect 2x2 smd: 1(-2,0) 2(2,0)
  silkscreen extent -3.67,-1.3 0.74,1.3, body extent -2.16,-1.3 2.16,1.3, height 2.2
QFN50P700X900X410_HS-55N#1 [mm] "QFN, 54-Leads, Body 7.00x9.00mm, Pitch 0.50mm, Thermal Pad 0.70x0.70mm, IPC Medium Density"
  rrect50% 0.7x0.25 smd mask+0.05: 1(-3.325,3.75) 2(-3.325,3.25) 3(-3.325,2.75) 4(-3.325,1.75) 4(-3.325,2.25) 5(-3.325,-0.25) 5(-3.325,0.25) 5(-3.325,0.75) 5(-3.325,1.25) 6(-3.325,-2.75) 6(-3.325,-2.25) 6(-3.325,-1.75) 6(-3.325,-1.25) 6(-3.325,-0.75) 6(-3.325,-3.25) 7(-3.325,-3.75) 8(-0.65,-4.1) 8(-0.15,-4.1) 9(1.575,-4.1) 10(3.325,-3.75) 11(3.325,-2.75) 11(3.325,-2.25) 11(3.325,-1.75) 11(3.325,-1.25) 11(3.325,-0.75) 11(3.325,-0.25) 11(3.325,0.25) 11(3.325,0.75) 11(3.325,-3.25) 12(3.325,1.25) 12(3.325,1.75) 13(3.325,2.25) 13(3.325,2.75) 14(3.325,3.25) 15(3.325,3.75) 18(-0.64,4.1) 18(-0.15,4.1)
  rrect50% 0.25x0.7 smd mask+0.05: 1(-2.775,4.325) 4(-3.1,1.98) 5(-3.1,0) 5(-3.1,0.53) 5(-3.1,0.99) 6(-3.1,-0.99) 6(-3.1,-3.01) 6(-3.1,-2.46) 6(-3.1,-1.95) 6(-3.1,-1.48) 7(-2.775,-4.325) 8(-0.895,-4.325) 8(-0.395,-4.325) 8(0.105,-4.325) 9(1.33,-4.325) 9(1.83,-4.325) 10(2.775,-4.325) 11(3.1,-1.06) 11(3.1,-0.53) 11(3.1,-0.01) 11(3.1,0.48) 11(3.1,-3.01) 11(3.1,-2.51) 11(3.1,-2.03) 11(3.1,-1.51) 12(3.1,1.5) 13(3.1,2.48) 15(2.775,4.325) 16(1.83,4.325) 17(1.33,4.325) 18(-0.895,4.325) 18(-0.395,4.325) 18(0.105,4.325)
  Top Layer region: 2.75,-4.55 3.55,-4.55 3.55,-3.73 2.75,-3.73
  Top Layer region: 1.33,-4.675 1.83,-4.675 1.83,-4.075 1.33,-4.075
  Top Layer region: -3.55,-4.55 0.635,-4.55 0.635,-0.75 -3.55,-0.75
  Top Layer region: -3.244,3.625 -2.649,3.625 -2.649,4.245 -3.244,4.245
  Top Layer region: -3.244,-4.245 -2.649,-4.245 -2.649,-3.625 -3.244,-3.625
  Top Layer region: 3.245,-3.625 2.65,-3.625 2.65,-4.245 3.245,-4.245
  Top Layer region: 3.245,4.245 2.65,4.245 2.65,3.625 3.245,3.625
  Top Layer region: -3.54,3.625 -2.65,3.625 -2.65,4.55 -3.54,4.55
  Top Layer region: -3.55,1.7 -3.05,1.7 -3.05,2.25 -3.55,2.25
  Top Layer region: 1.035,-3.675 2.34,-3.675 2.34,-0.01 1.035,-0.01
  Top Layer region: -3.55,-0.23 2.325,-0.23 2.325,1.25 -3.55,1.25
  Top Layer region: -2.34,0.96 0.69,0.96 0.69,4.55 -2.34,4.55
  Top Layer region: 0.45,0.96 2.325,0.96 2.325,3.675 0.45,3.675
  Top Layer region: 3.095,-3.27 3.675,-3.27 3.675,0.73 3.095,0.73
  Top Layer region: 3.115,2.25 3.675,2.25 3.675,2.74 3.115,2.74
  Top Layer region: 3.125,1.25 3.675,1.25 3.675,1.75 3.125,1.75
  Top Layer region: 2.78,3.77 3.55,3.77 3.55,4.55 2.78,4.55
  Top Layer lines w0.25: 3.55,3.77 3.55,4.375 3.55,4.55 3.115,4.55 2.78,4.55 ; 3.55,-3.75 3.55,-4.55 2.775,-4.55 ; 1.035,-0.25 1.035,-3.675 2.325,-3.675 2.325,3.675 0.625,3.675 0.625,4.55 0.105,4.55 -0.395,4.55 -0.895,4.55 -2.34,4.55 -2.34,1.502 -2.34,1.25 -2.38,1.25 -2.592,1.25 -3.1,1.25 -3.325,1.25 -3.55,1.25 -3.55,0.75 -3.55,0.25 -3.55,-0.25 -3.325,-0.25 -3.1,-0.25 0.778,-0.25 0.79,-0.25 ; -2.78,4.55 -3.244,4.55 -3.54,4.55 ; -3.55,4.55 -3.55,3.75 ; -3.55,2.25 -3.55,1.75 ; 0.635,-0.755 0.635,-4.55 0.105,-4.55 -0.395,-4.55 -0.895,-4.55 -2.775,-4.55 -3.55,-4.55 -3.55,-3.75 -3.55,-3.25 -3.55,-2.75 -3.55,-2.25 -3.55,-1.75 -3.55,-1.25 -3.55,-0.75 -3.325,-0.75 -3.1,-0.75 0.62,-0.75 0.625,-0.755 0.635,-0.755
  Top Layer lines w0.254: 1.033,-0.54 ccw(c0.74,-0.54) 0.778,-0.25 ccw(c0.74,-0.54) 0.74,-0.247 ; -2.337,1.54 cw(c-2.63,1.54) -2.34,1.502 cw(c-2.63,1.54) -2.592,1.25 cw(c-2.63,1.54) -2.63,1.247
  silkscreen extent -4.5,-4.72 3.73,4.72, body extent -3.57,-4.57 3.57,4.57, height 4.1
QFN50P700X900X410_HS-55N#2 [mm] "QFN, 54-Leads, Body 7.00x9.00mm, Pitch 0.50mm, Thermal Pad 0.70x0.70mm, IPC Medium Density"
  rrect50% 0.7x0.25 smd mask+0.05: 1(-3.325,3.75) 2(-3.325,3.25) 3(-3.325,2.75) 4(-3.325,1.75) 4(-3.325,2.25) 5(-3.325,-0.25) 5(-3.325,0.25) 5(-3.325,0.75) 5(-3.325,1.25) 6(-3.325,-2.75) 6(-3.325,-2.25) 6(-3.325,-1.75) 6(-3.325,-1.25) 6(-3.325,-0.75) 6(-3.325,-3.25) 7(-3.325,-3.75) 8(-0.65,-4.1) 8(-0.15,-4.1) 9(1.575,-4.1) 10(3.325,-3.75) 11(3.325,-2.75) 11(3.325,-2.25) 11(3.325,-1.75) 11(3.325,-1.25) 11(3.325,-0.75) 11(3.325,-0.25) 11(3.325,0.25) 11(3.325,0.75) 11(3.325,-3.25) 12(3.325,1.25) 12(3.325,1.75) 13(3.325,2.25) 13(3.325,2.75) 14(3.325,3.25) 15(3.325,3.75) 18(-0.64,4.1) 18(-0.15,4.1)
  rrect50% 0.25x0.7 smd mask+0.05: 1(-2.775,4.325) 4(-3.1,1.98) 5(-3.1,0) 5(-3.1,0.53) 5(-3.1,0.99) 6(-3.1,-0.99) 6(-3.1,-3.01) 6(-3.1,-2.46) 6(-3.1,-1.95) 6(-3.1,-1.48) 7(-2.775,-4.325) 8(-0.895,-4.325) 8(-0.395,-4.325) 8(0.105,-4.325) 9(1.33,-4.325) 9(1.83,-4.325) 10(2.775,-4.325) 11(3.1,-1.06) 11(3.1,-0.53) 11(3.1,-0.01) 11(3.1,0.48) 11(3.1,-3.01) 11(3.1,-2.51) 11(3.1,-2.03) 11(3.1,-1.51) 12(3.1,1.5) 13(3.1,2.48) 15(2.775,4.325) 16(1.83,4.325) 17(1.33,4.325) 18(-0.895,4.325) 18(-0.395,4.325) 18(0.105,4.325)
  Top Layer region: 2.75,-4.55 3.55,-4.55 3.55,-3.73 2.75,-3.73
  Top Layer region: 1.33,-4.675 1.83,-4.675 1.83,-4.075 1.33,-4.075
  Top Layer region: -3.55,-4.55 0.635,-4.55 0.635,-0.75 -3.55,-0.75
  Top Layer region: -3.245,3.625 -2.65,3.625 -2.65,4.245 -3.245,4.245
  Top Layer region: -3.245,-4.245 -2.65,-4.245 -2.65,-3.625 -3.245,-3.625
  Top Layer region: 3.245,-3.625 2.65,-3.625 2.65,-4.245 3.245,-4.245
  Top Layer region: 3.244,4.245 2.649,4.245 2.649,3.625 3.244,3.625
  Top Layer region: -3.54,3.625 -2.65,3.625 -2.65,4.55 -3.54,4.55
  Top Layer region: -3.55,1.7 -3.05,1.7 -3.05,2.25 -3.55,2.25
  Top Layer region: 1.035,-3.675 2.34,-3.675 2.34,-0.01 1.035,-0.01
  Top Layer region: -3.55,-0.23 2.325,-0.23 2.325,1.25 -3.55,1.25
  Top Layer region: -2.34,0.96 0.69,0.96 0.69,4.55 -2.34,4.55
  Top Layer region: 0.45,0.96 2.325,0.96 2.325,3.675 0.45,3.675
  Top Layer region: 3.095,-3.27 3.675,-3.27 3.675,0.73 3.095,0.73
  Top Layer region: 3.115,2.25 3.675,2.25 3.675,2.74 3.115,2.74
  Top Layer region: 3.125,1.25 3.675,1.25 3.675,1.75 3.125,1.75
  Top Layer region: 2.78,3.77 3.55,3.77 3.55,4.55 2.78,4.55
  Top Layer lines w0.25: 3.55,3.77 3.55,4.55 2.78,4.55 ; 3.55,-3.75 3.55,-4.55 2.775,-4.55 ; 1.035,-0.25 1.035,-3.675 2.325,-3.675 2.325,3.675 0.625,3.675 0.625,4.55 0.105,4.55 -0.395,4.55 -0.895,4.55 -2.34,4.55 -2.34,1.502 -2.34,1.25 -2.38,1.25 -2.592,1.25 -3.1,1.25 -3.325,1.25 -3.55,1.25 -3.55,0.75 -3.55,0.25 -3.55,-0.25 -3.325,-0.25 -3.1,-0.25 0.778,-0.25 0.79,-0.25 ; -2.78,4.55 -3.54,4.55 ; -3.55,4.55 -3.55,3.75 ; -3.55,2.25 -3.55,1.75 ; 0.635,-0.755 0.635,-4.55 0.105,-4.55 -0.395,-4.55 -0.895,-4.55 -2.775,-4.55 -3.55,-4.55 -3.55,-3.75 -3.55,-3.25 -3.55,-2.75 -3.55,-2.25 -3.55,-1.75 -3.55,-1.25 -3.55,-0.75 -3.325,-0.75 -3.1,-0.75 0.62,-0.75 0.625,-0.755 0.635,-0.755
  Top Layer lines w0.254: 1.033,-0.54 ccw(c0.74,-0.54) 0.778,-0.25 ccw(c0.74,-0.54) 0.74,-0.247 ; -2.337,1.54 cw(c-2.63,1.54) -2.34,1.502 cw(c-2.63,1.54) -2.592,1.25 cw(c-2.63,1.54) -2.63,1.247
  silkscreen extent -4.5,-4.72 3.73,4.72, body extent -3.57,-4.57 3.57,4.57, height 4.1
"SMA Straight PCB" [mm]
  round 1.5 smd: 1(0,0)
  round 2.55 hole 1.7: P1(-2.54,2.54) P2(2.54,2.54) P3(2.54,-2.54) P4(-2.54,-2.54)
  silkscreen extent -1.4,-3.5 1.4,3.5
SOIC127P370X94-2N [mm] "SOIC, 2-Leads, Body 1.60x2.69mm, Pitch 1.27mm, IPC Medium Density"
  rect 0.9x0.8 smd: A(1.85,0) C(-1.85,0)
  silkscreen extent -1.97,-0.9 1,1.08, body extent -1.4,-0.9 1.4,0.9, height 1.35
SOP254P990X385-4N [mm] "SOP, 4-Leads, Body 6.55x6.70mm, Pitch 2.54mm, IPC Medium Density"
  oval 1.9x0.75 smd: 1(-4.45,1.27) 2(-4.45,-1.27) 3(4.45,-1.27) 4(4.45,1.27)
  silkscreen extent -4.57,-3.45 3.1,3.45, body extent -3.5,-3.45 3.5,3.45, height 3.85
SOT95P280X145-6N [mil]
  rect 50x22 smd: 1(-51,37) 2(-51,0) 3(-51,-37) 4(51,-37) 5(51,0) 6(51,37)
  silkscreen extent -21,48 21,60
SOT-23-3 [mm]
  rect 1x0.6 smd: 1(-1.2,0.95) 2(-1.2,-0.95) 3(1.2,0)
  silkscreen extent -1.32,-1.5 0.7,1.93, body extent -0.7,-1.5 0.7,1.5, height 1.1
SX1211 [mm]
  rect 3.68x3.68 smd: 0(0,0)
  rect 0.81x0.27 smd: 1(-2.445,1.75) 2(-2.445,1.25) 3(-2.445,0.75) 4(-2.445,0.25) 5(-2.445,-0.25) 6(-2.445,-0.75) 7(-2.445,-1.25) 8(-2.445,-1.75) 17(2.445,-1.75) 18(2.445,-1.25) 19(2.445,-0.75) 20(2.445,-0.25) 21(2.445,0.25) 22(2.445,0.75) 23(2.445,1.25) 24(2.445,1.75)
  rect 0.27x0.81 smd: 9(-1.75,-2.445) 10(-1.25,-2.445) 11(-0.75,-2.445) 12(-0.25,-2.445) 13(0.25,-2.445) 14(0.75,-2.445) 15(1.25,-2.445) 16(1.75,-2.445) 25(1.75,2.445) 26(1.25,2.445) 27(0.75,2.445) 28(0.25,2.445) 29(-0.25,2.445) 30(-0.75,2.445) 31(-1.25,2.445) 32(-1.75,2.445)
  silkscreen extent -3.45,-2.5 2.5,2.5
TECO-282836-2_V [mm] "Female Header, Pitch 5mm, 1 x 2 Position, Height 10mm"
  rect 1.6x1.6 hole 1.1: 1(-2.5,0)
  round 1.6 hole 1.1: 2(2.5,0)
  silkscreen extent -5.6,-4.1 5,4.88, body extent -5.6,-4.1 5,4.1, height 10
TSQFP50P900X900X160-48N [mm] "TSQFP, 48-Leads, Body 7.00x7.00mm, Pitch 0.50mm, IPC Medium Density"
  oval 1.45x0.3 smd: 1(-4.225,2.75) 2(-4.225,2.25) 3(-4.225,1.75) 4(-4.225,1.25) 5(-4.225,0.75) 6(-4.225,0.25) 7(-4.225,-0.25) 8(-4.225,-0.75) 9(-4.225,-1.25) 10(-4.225,-1.75) 11(-4.225,-2.25) 12(-4.225,-2.75) 25(4.225,-2.75) 26(4.225,-2.25) 27(4.225,-1.75) 28(4.225,-1.25) 29(4.225,-0.75) 30(4.225,-0.25) 31(4.225,0.25) 32(4.225,0.75) 33(4.225,1.25) 34(4.225,1.75) 35(4.225,2.25) 36(4.225,2.75)
  oval 0.3x1.45 smd: 13(-2.75,-4.225) 14(-2.25,-4.225) 15(-1.75,-4.225) 16(-1.25,-4.225) 17(-0.75,-4.225) 18(-0.25,-4.225) 19(0.25,-4.225) 20(0.75,-4.225) 21(1.25,-4.225) 22(1.75,-4.225) 23(2.25,-4.225) 24(2.75,-4.225) 37(2.75,4.225) 38(2.25,4.225) 39(1.75,4.225) 40(1.25,4.225) 41(0.75,4.225) 42(0.25,4.225) 43(-0.25,4.225) 44(-0.75,4.225) 45(-1.25,4.225) 46(-1.75,4.225) 47(-2.25,4.225) 48(-2.75,4.225)
  silkscreen extent -4.35,-3.1 3.1,3.57, body extent -3.5,-3.5 3.5,3.5, height 1.6

## Part data
C1 C2 C14 C20 C21 C22 C23: Capacitance=1uF, Case/Package=0603, Case Code (Metric)=1608, Dielectric=X5R, Manufacturer=Murata, Manufacturer Part Number=GRM188R61A105KA61J, Max Operating Temperature=85°C, Min Operating Temperature=-55°C, Package Quantity=1, Supplier Part Number 1=GRM188R61A105KA61J-ND, Tolerance=10%, Voltage Rating=10V, Case Code (Imperial)=0603, ComponentLink1Description=https://datasheet.ciiva.com/6270/product-6270752.pdf, ComponentLink1URL=https://datasheet.ciiva.com/6270/product-6270752.pdf, ComponentLink2Description=https://datasheet.ciiva.com/6270/partnumbering-e-01-6270748.pdf, ComponentLink2URL=https://datasheet.ciiva.com/6270/partnumbering-e-01-6270748.pdf, ComponentLink3Description=https://datasheet.ciiva.com/6270/partnumbering-e-01-6270750.pdf, ComponentLink3URL=https://datasheet.ciiva.com/6270/partnumbering-e-01-6270750.pdf, Depth=0.8mm, Height=0.8mm, Length=1.6mm, Mount="Surface Mount", Packaging="Tape and Reel", Pricing 1="30000=0.0118 (USD)", Radiation Hardening=No, REACH SVHC="No SVHC", Stock 1=0, Supplier 1=Digi-Key, Termination=SMD/SMT, Thickness=0.035inch, Voltage Rating (DC)=10V, Width=0.031inch
C3: Capacitance=220nF, Case/Package=0603, Case Code (Metric)=1608, Dielectric=X7R, Manufacturer=Murata, Manufacturer Part Number=GRM188R71E224KA88D, Max Operating Temperature=125°C, Min Operating Temperature=-55°C, Package Quantity=1, Supplier Part Number 1=490-3290-2-ND, Tolerance=10%, Voltage=50V, Voltage Rating=25V, Case Code (Imperial)=0603, ComponentLink1Description=https://datasheet.ciiva.com/5411/product-5411362.pdf, ComponentLink1URL=https://datasheet.ciiva.com/5411/product-5411362.pdf, ComponentLink2Description=https://datasheet.ciiva.com/11786/0900766b807a1cab-11786308.pdf, ComponentLink2URL=https://datasheet.ciiva.com/11786/0900766b807a1cab-11786308.pdf, ComponentLink3Description=https://datasheet.ciiva.com/14116/nmgrm-data-en-14116629.pdf, ComponentLink3URL=https://datasheet.ciiva.com/14116/nmgrm-data-en-14116629.pdf, ComponentLink4Description=https://datasheet.ciiva.com/3777/1531grm188r71e224ka8823-3777688.pdf, ComponentLink4URL=https://datasheet.ciiva.com/3777/1531grm188r71e224ka8823-3777688.pdf, ComponentLink5Description=https://datasheet.ciiva.com/6068/1784408-6068393.pdf, ComponentLink5URL=https://datasheet.ciiva.com/6068/1784408-6068393.pdf, ComponentLink6Description=https://datasheet.ciiva.com/16425/product-16425866.pdf, ComponentLink6URL=https://datasheet.ciiva.com/16425/product-16425866.pdf, ComponentLink7Description=https://datasheet.ciiva.com/22703/1784408-22703338.pdf, ComponentLink7URL=https://datasheet.ciiva.com/22703/1784408-22703338.pdf, ComponentLink8Description=https://datasheet.ciiva.com/133/grm188r71e224ka88-01-133883.pdf, ComponentLink8URL=https://datasheet.ciiva.com/133/grm188r71e224ka88-01-133883.pdf, ComponentLink9Description=https://datasheet.ciiva.com/133/grm188r71e224ka88-01-133884.pdf, ComponentLink9URL=https://datasheet.ciiva.com/133/grm188r71e224ka88-01-133884.pdf, ComponentLink10Description=https://datasheet.ciiva.com/7937/1784408-7937645.pdf, ComponentLink10URL=https://datasheet.ciiva.com/7937/1784408-7937645.pdf, ComponentLink11Description=https://datasheet.ciiva.com/48436/nmgrm-data-en-48436687.pdf, ComponentLink11URL=https://datasheet.ciiva.com/48436/nmgrm-data-en-48436687.pdf, ComponentLink12Description=https://datasheet.ciiva.com/29202/451619-da-01-en-vs-kondensator-0603-29202002.pdf, ComponentLink12URL=https://datasheet.ciiva.com/29202/451619-da-01-en-vs-kondensator-0603-29202002.pdf, Depth=0.8mm, Height=0.8mm, Lead Free="Lead Free", Length=1.6mm, Material=Ceramic, Mount="Surface Mount", Number of Pins=2, Packaging="Tape and Reel", Pricing 1="4000=0.02634 (USD)", Radiation Hardening=No, REACH SVHC="No SVHC", Stock 1=0, Supplier 1=Digi-Key, Termination=SMD/SMT, Thickness=0.035inch, Voltage Rating (DC)=25V, Width=0.8mm
C5: Capacitance=22pF, Case/Package=0603, Case Code (Metric)=1608, Dielectric=C0G, Dielectric Material=Ceramic, Insulation Resistance=10GR, Manufacturer=Murata, Manufacturer Part Number=GRM1885C1H220JA01D, Max Operating Temperature=125°C, Min Operating Temperature=-55°C, Package Quantity=1, Supplier Part Number 1=490-1411-2-ND, Temperature Coefficient=30ppm/°C, Tolerance=10%, Voltage=50V, Case Code (Imperial)=0603, ComponentLink1Description=https://datasheet.ciiva.com/131/product-131760.pdf, ComponentLink1URL=https://datasheet.ciiva.com/131/product-131760.pdf, ComponentLink2Description=https://datasheet.ciiva.com/131/partnumbering-e-01-131761.pdf, ComponentLink2URL=https://datasheet.ciiva.com/131/partnumbering-e-01-131761.pdf, ComponentLink3Description=https://datasheet.ciiva.com/14116/grmseries-tc-hitype-eng-14116853.pdf, ComponentLink3URL=https://datasheet.ciiva.com/14116/grmseries-tc-hitype-eng-14116853.pdf, ComponentLink4Description=https://datasheet.ciiva.com/3776/1156grm1885c1h220ja0123-3776984.pdf, ComponentLink4URL=https://datasheet.ciiva.com/3776/1156grm1885c1h220ja0123-3776984.pdf, ComponentLink5Description=https://datasheet.ciiva.com/14116/grmseries-tc-hitype-eng-14116826.pdf, ComponentLink5URL=https://datasheet.ciiva.com/14116/grmseries-tc-hitype-eng-14116826.pdf, ComponentLink6Description=https://datasheet.ciiva.com/11786/0900766b807a1cab-11786398.pdf, ComponentLink6URL=https://datasheet.ciiva.com/11786/0900766b807a1cab-11786398.pdf, ComponentLink7Description=https://datasheet.ciiva.com/131/partnumbering-e-01-131759.pdf, ComponentLink7URL=https://datasheet.ciiva.com/131/partnumbering-e-01-131759.pdf, Depth=0.8mm, Height=0.8mm, Lead Free="Lead Free", Length=1.6mm, Material=Ceramic, Mount="Surface Mount", Number of Pins=2, Packaging="Tape and Reel", Pricing 1="4000=0.01466 (USD)", Radiation Hardening=No, REACH SVHC="No SVHC", Stock 1=0, Supplier 1=Digi-Key, Termination=SMD/SMT, Thickness=0.035inch, Voltage Rating=50V, Voltage Rating (DC)=50V, Width=0.031inch
C6: Capacitance=1.8pF, Case/Package=0603, Case Code (Metric)=1608, Dielectric=C0G, Manufacturer=Murata, Manufacturer Part Number=GRM1885C1H1R8CA01D, Max Operating Temperature=125°C, Min Operating Temperature=-55°C, Package Quantity=4000, Supplier Part Number 1=GRM1885C1H1R8CA01D-ND, Voltage=50V, Case Code (Imperial)=0603, ComponentLink1Description=https://datasheet.ciiva.com/15381/product-15381873.pdf, ComponentLink1URL=https://datasheet.ciiva.com/15381/product-15381873.pdf, ComponentLink2Description=https://datasheet.ciiva.com/29538/partnumbering-e-01-29538301.pdf, ComponentLink2URL=https://datasheet.ciiva.com/29538/partnumbering-e-01-29538301.pdf, ComponentLink3Description=https://datasheet.ciiva.com/41860/partnumbering-e-01-41860766.pdf, ComponentLink3URL=https://datasheet.ciiva.com/41860/partnumbering-e-01-41860766.pdf, Depth=0.8mm, Height=0.8mm, Lead Free="Lead Free", Lead Pitch=0.5mm, Length=1.6mm, Mount="Surface Mount", Packaging="Tape and Reel", Pricing 1="12000=0.0088 (USD)", REACH SVHC="No SVHC", Stock 1=0, Supplier 1=Digi-Key, Termination=SMD/SMT, Thickness=0.035inch, Voltage Rating=50V, Voltage Rating (DC)=50V, Width=0.8mm
C9: Capacitance=680pF, Case/Package=0603, Case Code (Metric)=1608, Dielectric=C0G, Dielectric Material=Ceramic, Insulation Resistance=10GR, Manufacturer=Murata, Manufacturer Part Number=GRM1885C1H681JA01D, Max Operating Temperature=125°C, Min Operating Temperature=-55°C, Package Quantity=1, Supplier Part Number 1=490-1447-2-ND, Temperature Coefficient=30ppm/°C, Tolerance=5%, Voltage=50V, Case Code (Imperial)=0603, ComponentLink1Description=https://datasheet.ciiva.com/132/product-132816.pdf, ComponentLink1URL=https://datasheet.ciiva.com/132/product-132816.pdf, ComponentLink2Description=https://datasheet.ciiva.com/18102/getdatasheetpartid-74199-18102533.pdf, ComponentLink2URL=https://datasheet.ciiva.com/18102/getdatasheetpartid-74199-18102533.pdf, ComponentLink3Description=https://datasheet.ciiva.com/11787/0900766b807a1cab-11787610.pdf, ComponentLink3URL=https://datasheet.ciiva.com/11787/0900766b807a1cab-11787610.pdf, ComponentLink4Description=https://datasheet.ciiva.com/5427/product-5427052.pdf, ComponentLink4URL=https://datasheet.ciiva.com/5427/product-5427052.pdf, ComponentLink5Description=https://datasheet.ciiva.com/16356/product-16356044.pdf, ComponentLink5URL=https://datasheet.ciiva.com/16356/product-16356044.pdf, ComponentLink6Description=https://datasheet.ciiva.com/132/partnumbering-e-01-132814.pdf, ComponentLink6URL=https://datasheet.ciiva.com/132/partnumbering-e-01-132814.pdf, ComponentLink7Description=https://datasheet.ciiva.com/6068/4360-6068366.pdf, ComponentLink7URL=https://datasheet.ciiva.com/6068/4360-6068366.pdf, ComponentLink8Description=https://datasheet.ciiva.com/132/partnumbering-e-01-132815.pdf, ComponentLink8URL=https://datasheet.ciiva.com/132/partnumbering-e-01-132815.pdf, ComponentLink9Description=https://datasheet.ciiva.com/29202/451105-da-01-en-vs-kondensator-0603-29202593.pdf, ComponentLink9URL=https://datasheet.ciiva.com/29202/451105-da-01-en-vs-kondensator-0603-29202593.pdf, Depth=0.8mm, Height=0.8mm, Lead Free="Lead Free", Length=1.6mm, Material=Ceramic, Mount="Surface Mount", Number of Pins=2, Packaging="Tape and Reel", Pricing 1="4000=0.02204 (USD)", Radiation Hardening=No, REACH SVHC="No SVHC", Stock 1=0, Supplier 1=Digi-Key, Termination=SMD/SMT, Thickness=0.035inch, Voltage Rating=50V, Voltage Rating (DC)=50V, Width=0.031inch
C10: Capacitance=47nF, Case/Package=0603, Case Code (Metric)=1608, Dielectric=X7R, Dielectric Material=Ceramic, Insulation Resistance=10GR, Manufacturer=Murata, Manufacturer Part Number=GRM188R71H473KA61D, Max Operating Temperature=125°C, Min Operating Temperature=-55°C, Package Quantity=1, Supplier Part Number 1=490-3287-6-ND, Tolerance=10%, Voltage=50V, Case Code (Imperial)=0603, ComponentLink1Description=https://datasheet.ciiva.com/7937/4360-7937672.pdf, ComponentLink1URL=https://datasheet.ciiva.com/7937/4360-7937672.pdf, ComponentLink2Description=https://datasheet.ciiva.com/14116/nmgrm-data-en-14116600.pdf, ComponentLink2URL=https://datasheet.ciiva.com/14116/nmgrm-data-en-14116600.pdf, ComponentLink3Description=https://datasheet.ciiva.com/7937/4360-7937673.pdf, ComponentLink3URL=https://datasheet.ciiva.com/7937/4360-7937673.pdf, ComponentLink4Description=https://datasheet.ciiva.com/48436/nmgrm-data-en-48436665.pdf, ComponentLink4URL=https://datasheet.ciiva.com/48436/nmgrm-data-en-48436665.pdf, ComponentLink5Description=https://datasheet.ciiva.com/7937/4360-7937674.pdf, ComponentLink5URL=https://datasheet.ciiva.com/7937/4360-7937674.pdf, ComponentLink6Description=https://datasheet.ciiva.com/132/grm188r71h473ka61-01-132379.pdf, ComponentLink6URL=https://datasheet.ciiva.com/132/grm188r71h473ka61-01-132379.pdf, ComponentLink7Description=https://datasheet.ciiva.com/132/grm188r71h473ka61-01-132380.pdf, ComponentLink7URL=https://datasheet.ciiva.com/132/grm188r71h473ka61-01-132380.pdf, ComponentLink8Description=https://datasheet.ciiva.com/5427/product-5427340.pdf, ComponentLink8URL=https://datasheet.ciiva.com/5427/product-5427340.pdf, ComponentLink9Description=https://datasheet.ciiva.com/11786/0900766b807a1cab-11786316.pdf, ComponentLink9URL=https://datasheet.ciiva.com/11786/0900766b807a1cab-11786316.pdf, ComponentLink10Description=https://datasheet.ciiva.com/16393/product-16393388.pdf, ComponentLink10URL=https://datasheet.ciiva.com/16393/product-16393388.pdf, ComponentLink11Description=https://datasheet.ciiva.com/132/grm188r71h473ka61-01-132381.pdf, ComponentLink11URL=https://datasheet.ciiva.com/132/grm188r71h473ka61-01-132381.pdf, ComponentLink12Description=https://datasheet.ciiva.com/18101/getdatasheetpartid-38124-18101149.pdf, ComponentLink12URL=https://datasheet.ciiva.com/18101/getdatasheetpartid-38124-18101149.pdf, ComponentLink13Description=https://datasheet.ciiva.com/29201/451904-da-01-en-vs-kondensator-0603-29201838.pdf, ComponentLink13URL=https://datasheet.ciiva.com/29201/451904-da-01-en-vs-kondensator-0603-29201838.pdf, Depth=0.8mm, Height=0.8mm, Lead Free="Lead Free", Length=1.6mm, Material=Ceramic, Mount="Surface Mount", Number of Pins=2, Packaging="Tape and Reel", Pricing 1="1=0.16, 10=0.114, 100=0.0538, 500=0.0377, 1000=0.03122 (USD)", Radiation Hardening=No, REACH SVHC="No SVHC", Stock 1=943, Supplier 1=Digi-Key, Termination=SMD/SMT, Thickness=0.035inch, Voltage Rating=50V, Voltage Rating (DC)=50V, Width=0.031inch
C11 C13 C15 C16 C17 C18 C19 C45 C49 C51: Capacitance=100nF, Case/Package=0603, Case Code (Metric)=1608, Dielectric=X7R, Dielectric Material=Ceramic, Insulation Resistance=10GR, Manufacturer=Murata, Manufacturer Part Number=GRM188R71H104KA93D, Max Operating Temperature=125°C, Min Operating Temperature=-55°C, Package Quantity=1, Supplier Part Number 1=490-1519-6-ND, Tolerance=10%, Voltage=50V, Case Code (Imperial)=0603, ComponentLink1Description=https://datasheet.ciiva.com/19467/1857604-19467681.pdf, ComponentLink1URL=https://datasheet.ciiva.com/19467/1857604-19467681.pdf, ComponentLink2Description=https://datasheet.ciiva.com/28534/4360-28534245.pdf, ComponentLink2URL=https://datasheet.ciiva.com/28534/4360-28534245.pdf, ComponentLink3Description=https://datasheet.ciiva.com/26915/getdatasheetpartid-89095-26915384.pdf, ComponentLink3URL=https://datasheet.ciiva.com/26915/getdatasheetpartid-89095-26915384.pdf, ComponentLink4Description=https://datasheet.ciiva.com/131/partnumbering-e-01-131738.pdf, ComponentLink4URL=https://datasheet.ciiva.com/131/partnumbering-e-01-131738.pdf, ComponentLink5Description=https://datasheet.ciiva.com/7937/1747470-7937658.pdf, ComponentLink5URL=https://datasheet.ciiva.com/7937/1747470-7937658.pdf, ComponentLink6Description=https://datasheet.ciiva.com/14116/nmgrm-data-en-14116602.pdf, ComponentLink6URL=https://datasheet.ciiva.com/14116/nmgrm-data-en-14116602.pdf, ComponentLink7Description=https://datasheet.ciiva.com/131/partnumbering-e-01-131739.pdf, ComponentLink7URL=https://datasheet.ciiva.com/131/partnumbering-e-01-131739.pdf, ComponentLink8Description=https://datasheet.ciiva.com/7937/4360-7937659.pdf, ComponentLink8URL=https://datasheet.ciiva.com/7937/4360-7937659.pdf, ComponentLink9Description=https://datasheet.ciiva.com/48436/nmgrm-data-en-48436667.pdf, ComponentLink9URL=https://datasheet.ciiva.com/48436/nmgrm-data-en-48436667.pdf, ComponentLink10Description=https://datasheet.ciiva.com/131/partnumbering-e-01-131740.pdf, ComponentLink10URL=https://datasheet.ciiva.com/131/partnumbering-e-01-131740.pdf, ComponentLink11Description=https://datasheet.ciiva.com/11786/0900766b807a1cab-11786047.pdf, ComponentLink11URL=https://datasheet.ciiva.com/11786/0900766b807a1cab-11786047.pdf, ComponentLink12Description=https://datasheet.ciiva.com/29201/451744-da-01-en-vs-kondensator-0603-29201904.pdf, ComponentLink12URL=https://datasheet.ciiva.com/29201/451744-da-01-en-vs-kondensator-0603-29201904.pdf, Contact Plating=Tin,Matte, Depth=0.8mm, Height=0.8mm, Lead Free="Lead Free", Length=1.6mm, Material=Ceramic, Mount="Surface Mount", Number of Pins=2, Packaging="Tape and Reel", Pricing 1="1=0.12, 10=0.084, 100=0.0396, 500=0.02778, 1000=0.023 (USD)", Radiation Hardening=No, REACH SVHC="No SVHC", Stock 1=0, Supplier 1=Digi-Key, Termination=SMD/SMT, Thickness=0.035inch, Voltage Rating=50V, Voltage Rating (DC)=50V, Width=0.8mm